# Altium PCB 2596.PcbDoc
Units mil, origin at the board's own origin, x right, y up, seen from the top; angles counter-clockwise.
Board outline 6000 x 4000 mil, 2 copper layers (Top Layer, Bottom Layer); 11 components, 7 nets, 34 pads, 0 vias.
Unrouted connection lines stored in the file: 1.
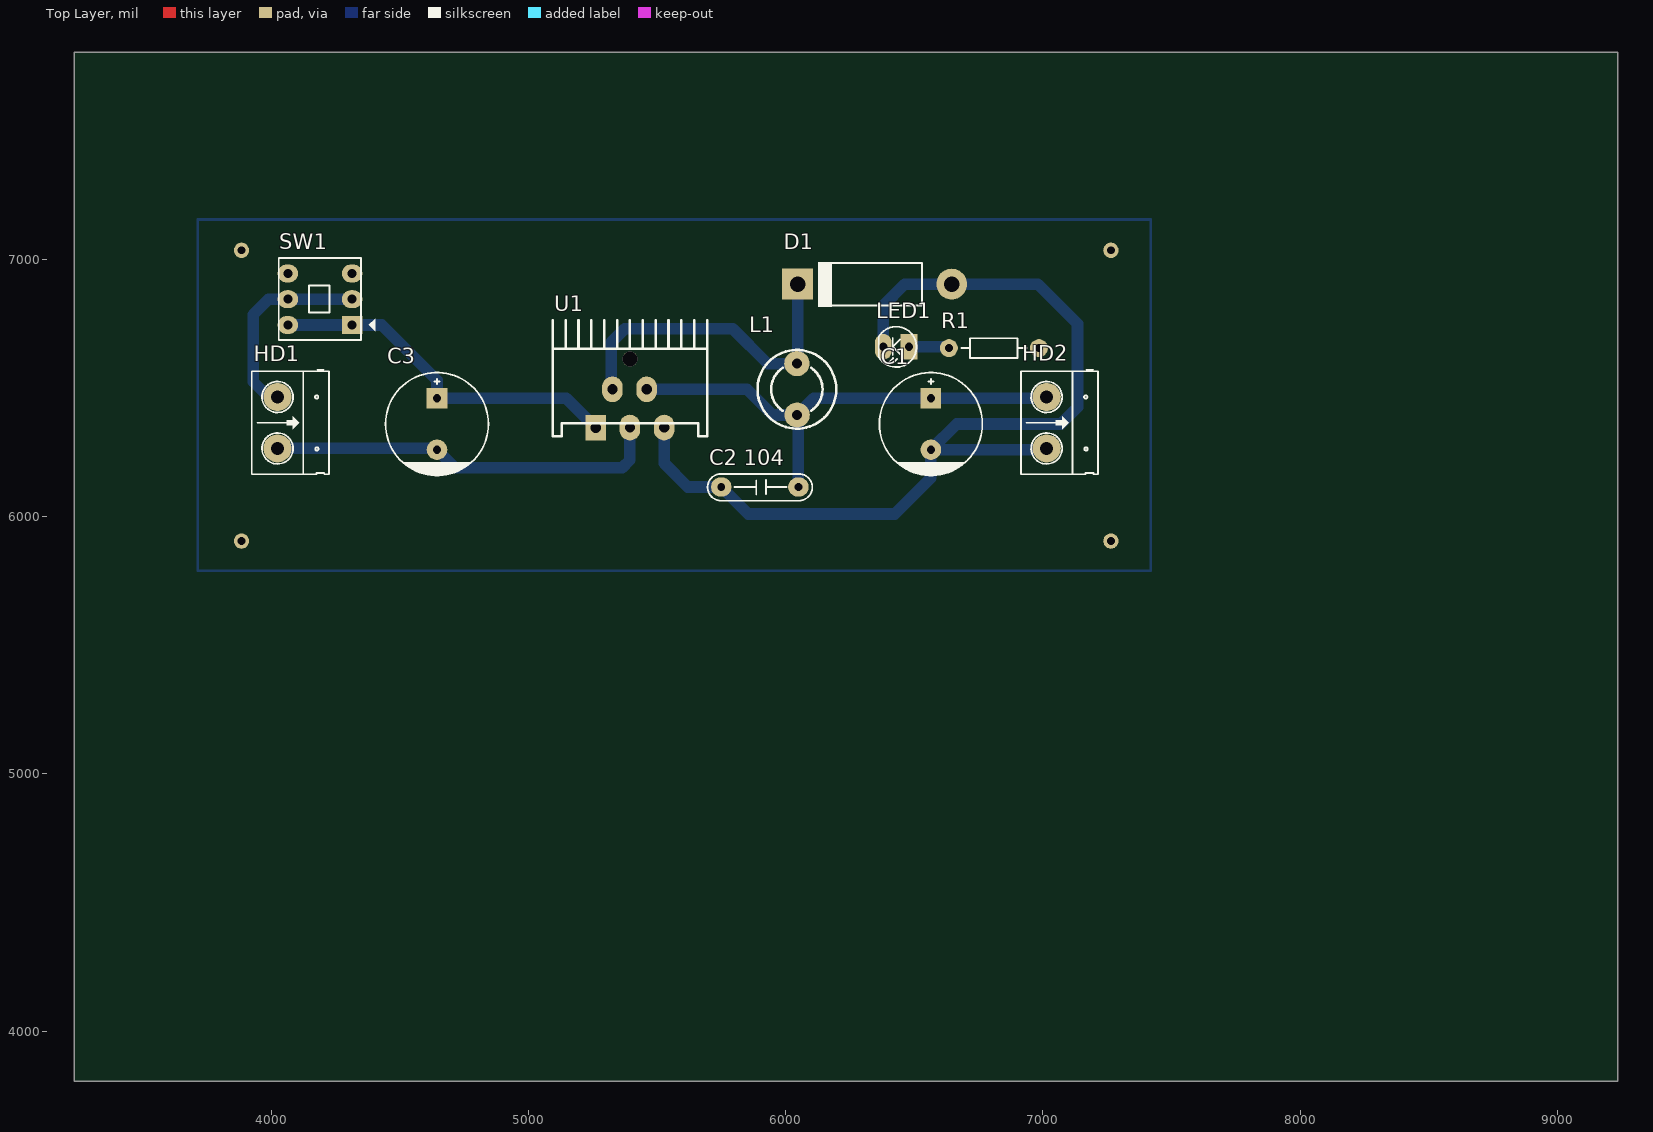
[diagram p0: Top Layer view]
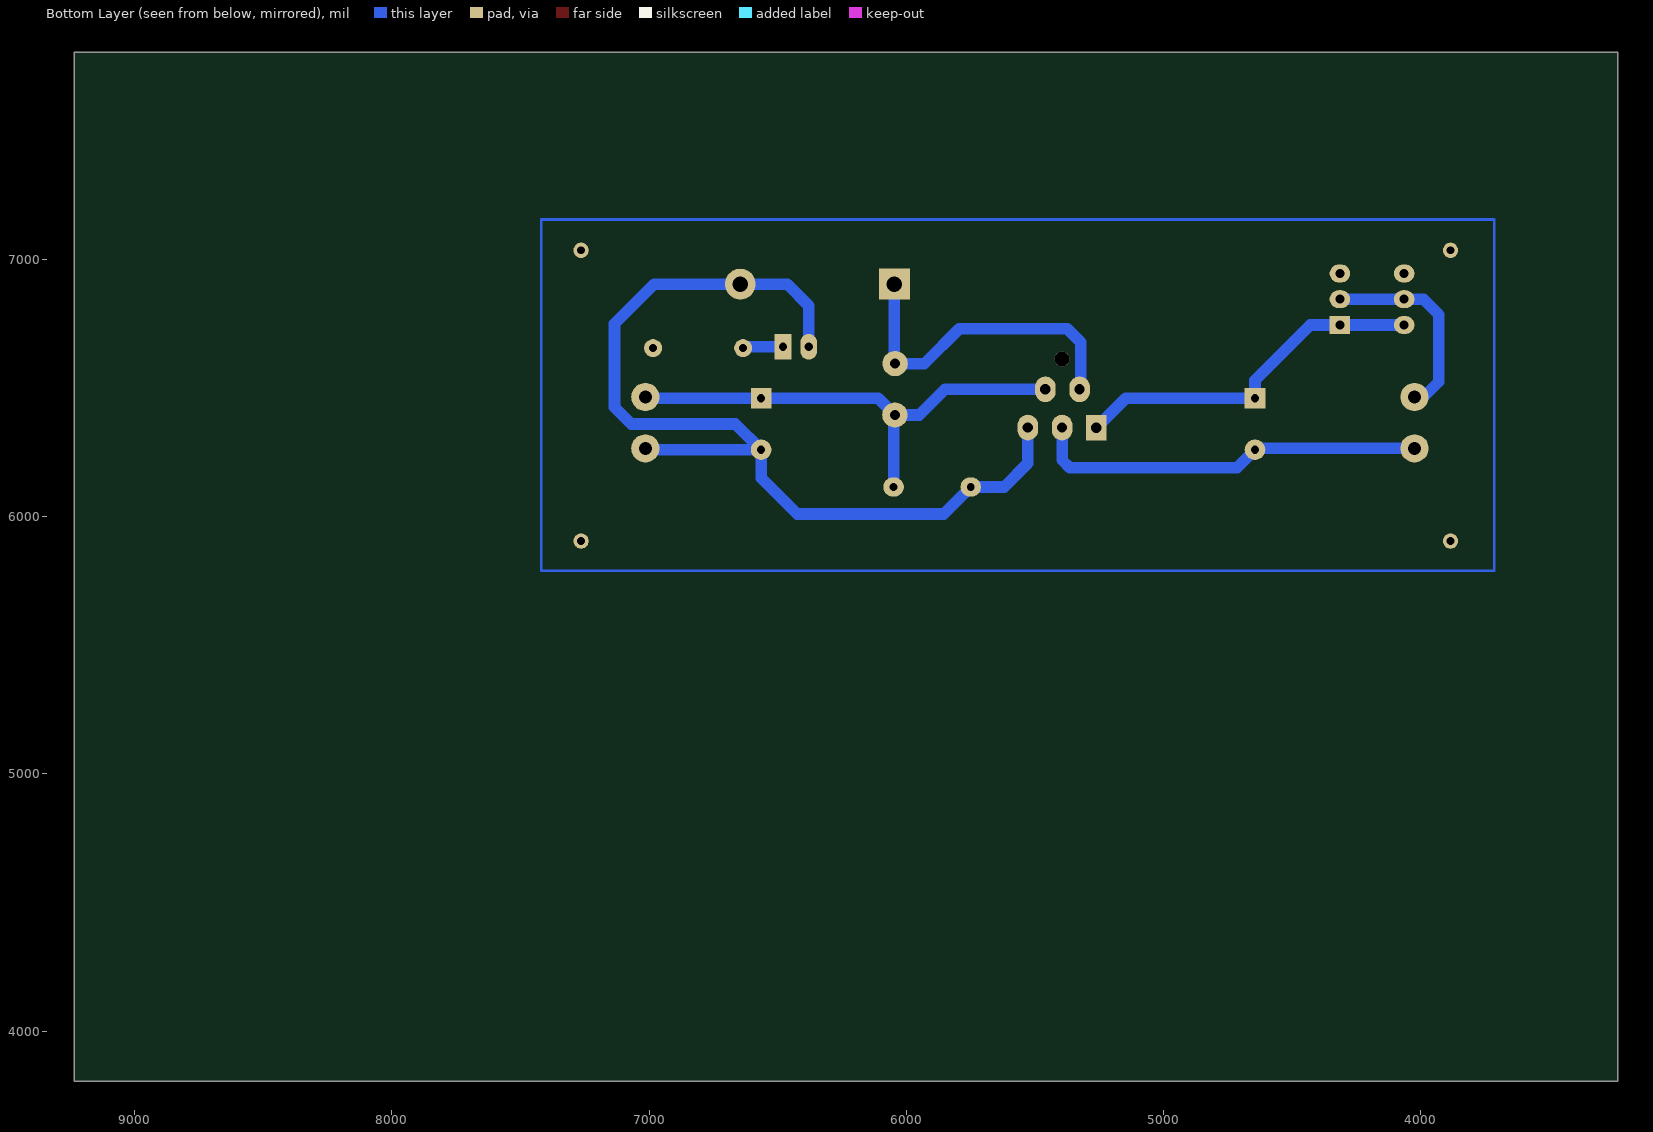
[diagram p1: Bottom Layer view, seen from below]
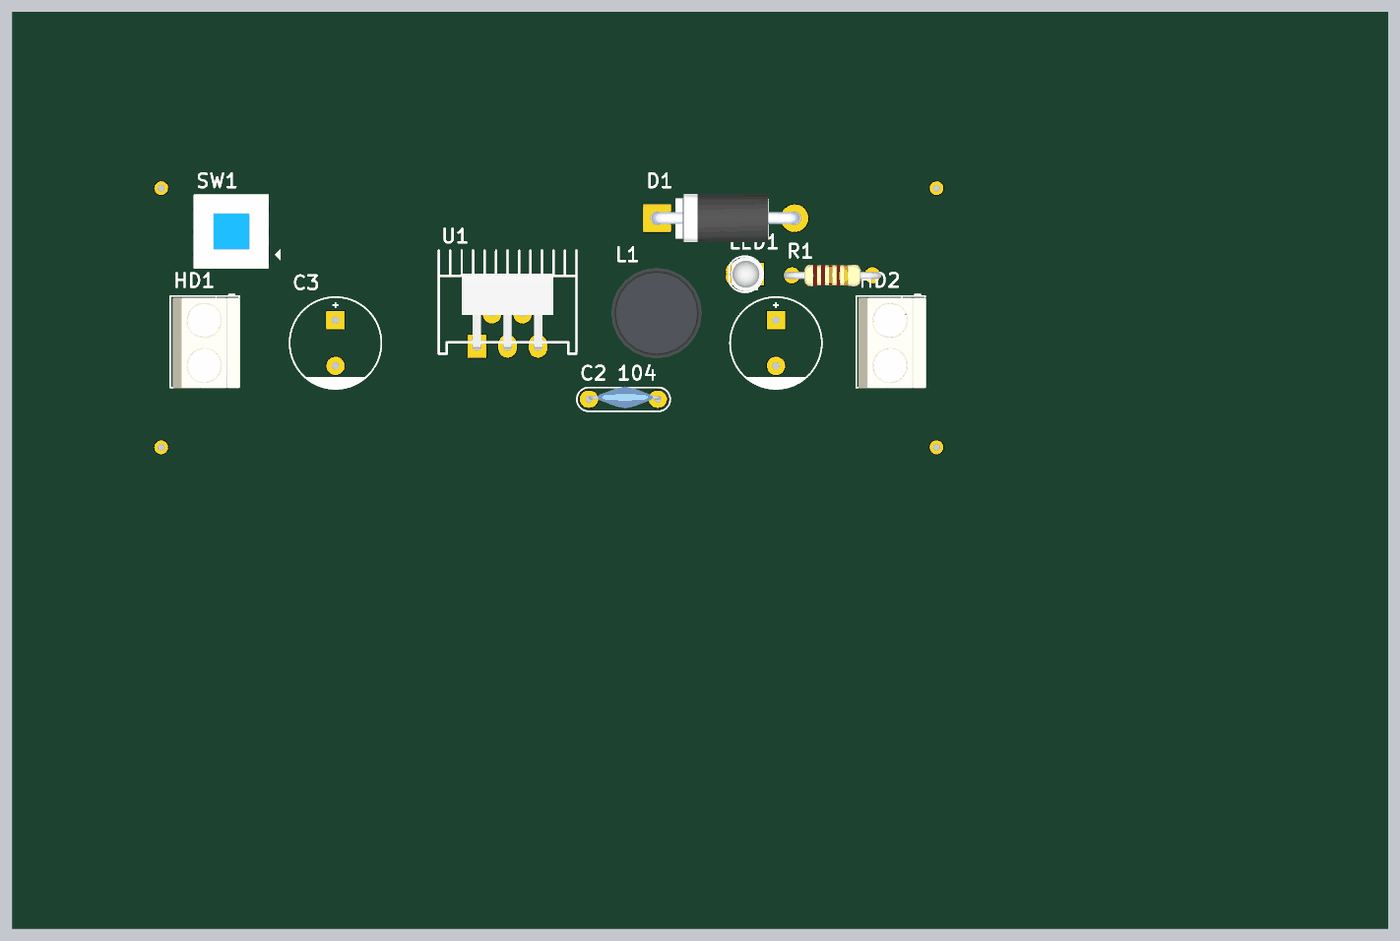
[diagram p2: 3D render of the assembled board from above, using the file's embedded part models]

## Layer stack, top to bottom
Top Solder: solder mask 0.4, Solder Resist, Dk 3.5
Top Layer: signal copper 1.4
Dielectric 1: dielectric 12.6, FR-4, Dk 4.8
Bottom Layer: signal copper 1.4
Bottom Solder: solder mask 0.4, Solder Resist, Dk 3.5

## Board outline
3235,3805 9235,3805 9235,7805 3235,7805

## Design rules (kind name [scope] priority, off if disabled: settings)
Clearance [All] p1: gap=20
PlaneConnect [All] p1: planeconnectstyle=Relief reliefexpansion=20 reliefentries=4 reliefconductorwidth=20 reliefairgap=10
PolygonConnect [All] p1: connectstyle=Relief reliefconductorwidth=20 reliefentries=4 polygonreliefangle="90 Angle" airgapwidth=10
RoomDefinition Sheet2 [InComponentClass('Sheet2')] p1: confinementstyle=ConfineIn formatcopy=TRUE lockcomponents=FALSE outline 3580,3770 13150,3770 13150,7515 3580,7515
RoutingVias [All] p1: holewidth=35 width=65 viastyle="Through Hole" minholewidth=35 minwidth=65 maxholewidth=35 maxwidth=65
SolderMaskExpansion [All] p1: expansion=4
Width [All] p1: maxlimit=65 minlimit=20 preferedwidth=45
29 further rules are at their usual default settings.

## Components (designator, comment, footprint, x,y, rotation, side; value= is the part's Value field where it differs from the comment)
C1 "CAP 1000uF" CP2/4 6565,6460 r270 top
"C2 104" "CAP gom" CN3 5750,6115 r0 top
C3 "CAP 1000uF" CP2/4 4645,6460 r270 top
D1 "FR307 3A" DIODE/POW/3A 6345,6905 r180 top
HD1 "Header 2" HED2 4025,6465 r270 top
HD2 "Header 2" HED2 7015,6465 r270 top
L1 "Conductor 150mH" "CUON CAM 200mil" 6044,6495 r270 top
LED1 "LED" LED-3 6480,6660 r180 top
R1 "1k" R1/4W 6985,6655 r180 top
SW1 "SW6A" SW6 4315,6745 r180 top
U1 "LM2576S" LM2576t 5394,6513 r0 top

## Footprints (in the part's own frame and the unit in brackets; to place one, negate y for a bottom-side part, rotate by r counter-clockwise, add the part's x,y. Pads: shape width x height; smd on the part's side, far side on the other; paste and mask are expansions set on the pad)
CN3 [mil] "Cap np W 0.3"
  oval 80x75 hole 31: 1(0,0) 2(300,0)
  silkscreen extent -53,-53 354,51, body extent 0,-39 315,55, height 419
CP2/4 [mil] "Tu hoa 1000uF/16V/25V"
  rect 80x80 hole 32: 1(0,0)
  round 80 hole 32: 2(200,0)
  silkscreen extent -100,-200 300,200
"CUON CAM 200mil" [mm]
  round 2.5 hole 1: 1(-2.54,0) 2(2.54,0.025)
  silkscreen extent -3.89,-3.88 3.89,3.89, body extent -4.87,-4.98 5.13,5.02, height 12.02
DIODE/POW/3A [mil]
  round 120 hole 60: 1(-301,1)
  rect 120x120 hole 60: 2(298,1)
  silkscreen extent -186,-85 219,90, body extent -321,-104 321,104, height 248
HED2 [mil] "Header 2, 2 pin, hight 300mil, Pin to Pin 200, Colour Green"
  round 110 hole 50: 1(0,0) 2(200,0)
  silkscreen extent -106,-100 300,200, body extent -92,-90 302,205, height 394
LED-3 [mil] "LED 2 PIN, 3ly Only colour"
  rect 65x100 hole 32: 1(0,0)
  oval 65x100 hole 32: 2(100,0)
  silkscreen extent -29,-78 118,79, body extent -29,-75 109,75, height 256
LM2576t [mil]
  rect 80x100 hole 40: 1(-132,-167.09)
  oval 80x100 hole 40: 2(-67,-18) 3(1,-167) 4(66,-18) 5(134,-167)
  round 59.06 hole 59.06: ""(1,100)
  silkscreen extent -299,-200 301,250, body extent -199,-175 201,150, height 859
R1/4W [mil] "R 1/4W, 2 Pin, 350mil"
  round 70 hole 31: 1(0,0) 2(350,0)
  silkscreen extent 48,-38 302,38, body extent -40,-47 386,47, height 111
SW6 [mil] "SW DTDP - 6Pin 260x300x300 mil"
  rect 80x70 hole 35: 1(0,0)
  oval 80x70 hole 35: 2(0,-100) 3(0,-200) 4(250,-200) 5(250,-100) 6(250,0)
  silkscreen extent -90,-260 285,58, body extent -33,-259 281,55, height 532

## Part data
C1 C3: library part "CAP hoa", "Cap"
D1: library part "Diode Power 3A", "Diode Power"
HD1 HD2: "Header 2 (Green)"
L1: library part Conductor
LED1: "LED Single colour Green and Red"
R1: library part R, "Resistor 1/4W"
SW1: "SW-DTDP - 6 Pin"
U1: "Simple Switcher 3A Step Down Voltage Regulator"

## Free pads (board coordinates)
  round 60 hole 30: 2(3885,7035) 3(3885,5905) 4(7265,7035) 5(7265,5905)

## Nets (pads, with @x,y where several pads share a name; then routed paths per layer and width w, separated by ;. In a path a pad name is that pad's centre, name@x,y a point inside that pad or via, vN(x,y) a via of type N, cw(c..) or ccw(c..) an arc to the next point about the centre after c; other vN are vias at no path point)
5V: R1.1
12V: HD1.1 SW1.2 SW1.5 | length 789.7
  Bottom Layer w45: HD1.1 3990,6465 3930,6525 3930,6785 3990,6845 SW1.5 SW1.2
GND: "C2 104.1" C1.2 C3.2 D1.1 HD1.2 HD2.2 LED1.2 U1.3 U1.5 | length 5394.1
  Bottom Layer w45: HD1.2 4640,6265 C3.2 4715,6190 5365,6190 5395,6220 U1.3 ; U1.5 5528,6207 5620,6115 5750,6115 5855,6010 6425,6010 6565,6150 C1.2 ; LED1.2 6380,6820 6464,6904 D1.1 6981,6904 7135,6750 7135,6425 7070,6360 6665,6360 C1.2 ; HD2.2 7010,6260 C1.2
NetC3_1: C3.1 SW1.1 SW1.6 U1.1 | length 1403.3
  Bottom Layer w45: SW1.6 SW1.1 4430,6745 4645,6530 C3.1 5147.91,6460 U1.1
NetD1_2: D1.2 L1.1 U1.2 | length 1293.4
  Bottom Layer w45: U1.2 5322.97,6499.03 5322.97,6677.97 5375,6730 5795,6730 5930,6595 L1.1 6047,6598 D1.2
NetLED1_1: LED1.1 R1.2 | length 157.1
  Bottom Layer w45: LED1.1 6630,6660 R1.2
VCC: "C2 104.2" C1.1 HD2.1 L1.2 U1.4 | length 1907.5
  Bottom Layer w45: U1.4 5850,6495 5950,6395 L1.2 ; 6050,6115 6050,6390 L1.2 ; HD2.1 7010,6460 C1.1 6110,6460 L1.2
pads on no net: SW1.3 SW1.4 U1.
copper on no net: | length 10135
  Bottom Layer w10: 3715,5790 7415,5790 7420,5790 7420,7155 3715,7155 3715,5795